# Altium PCB Hike_Buddy PCB Document.PcbDoc
Units mm, origin at the board's own origin, x right, y up, seen from the top; angles counter-clockwise.
Board outline 147 x 42.38 mm, 2 copper layers (Top Layer, Bottom Layer); 25 components, 18 nets, 121 pads, 10 vias.
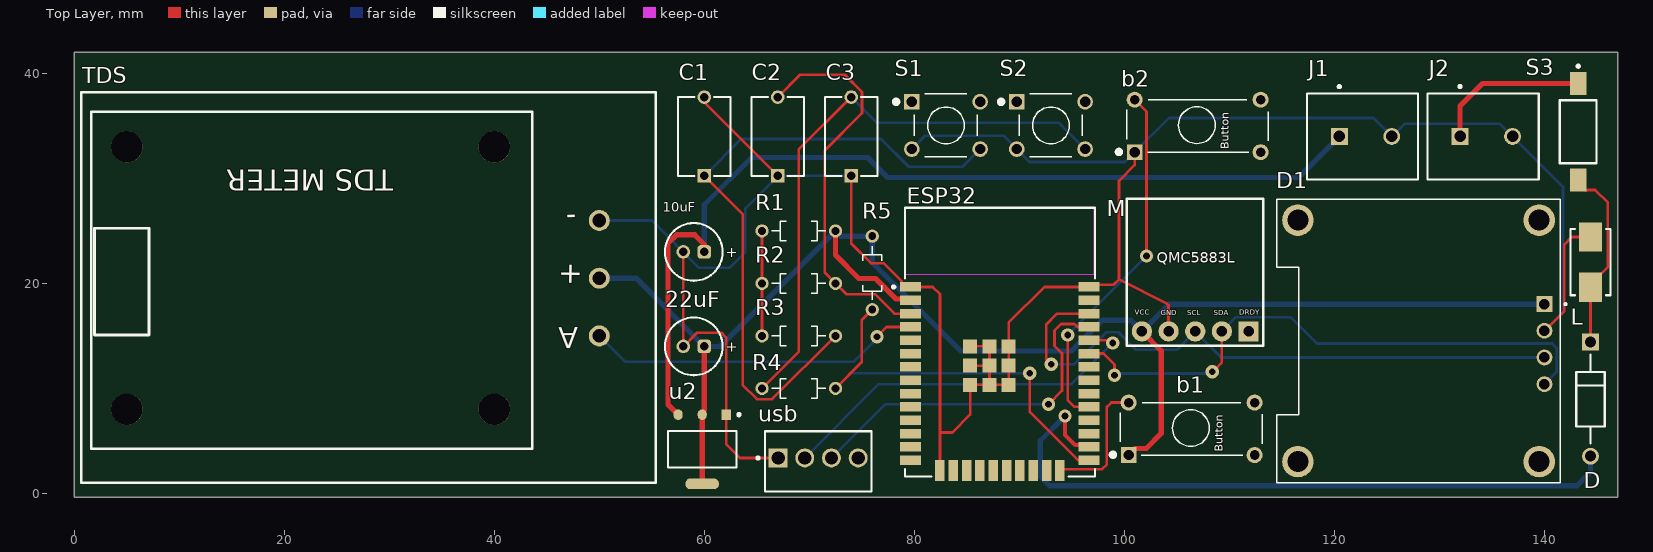
[diagram p0: Top Layer view]
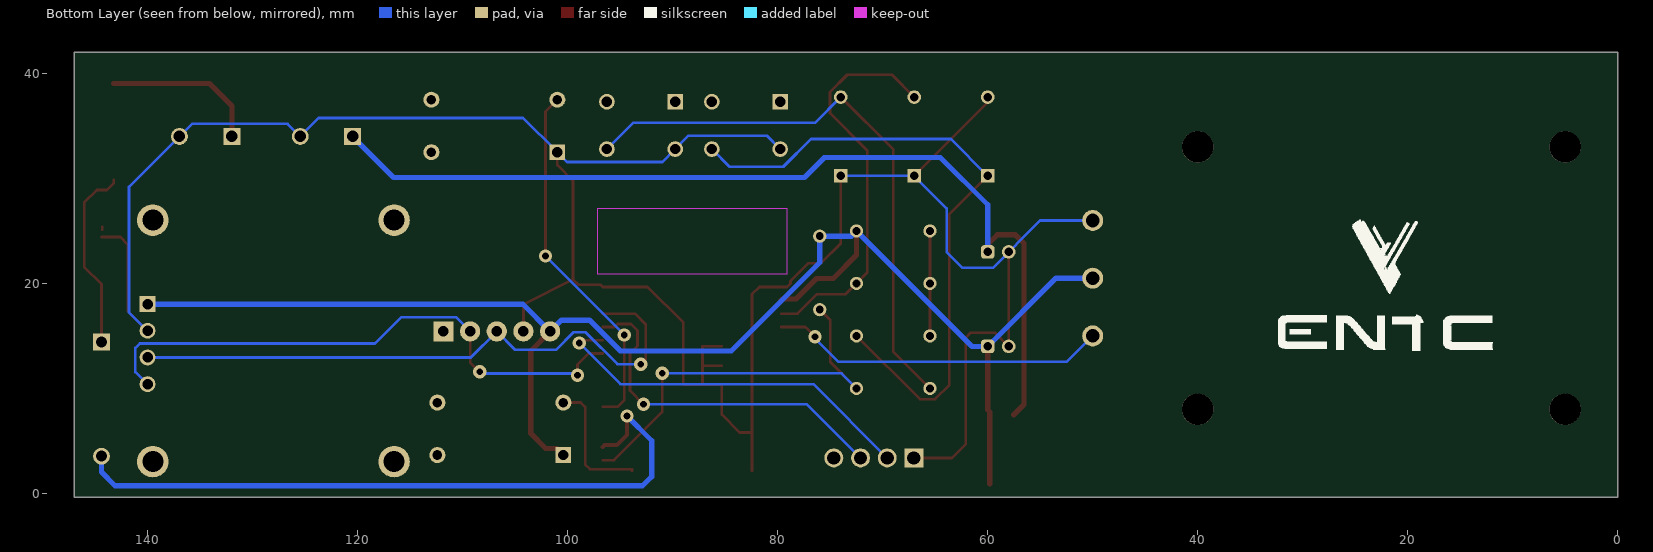
[diagram p1: Bottom Layer view, seen from below]
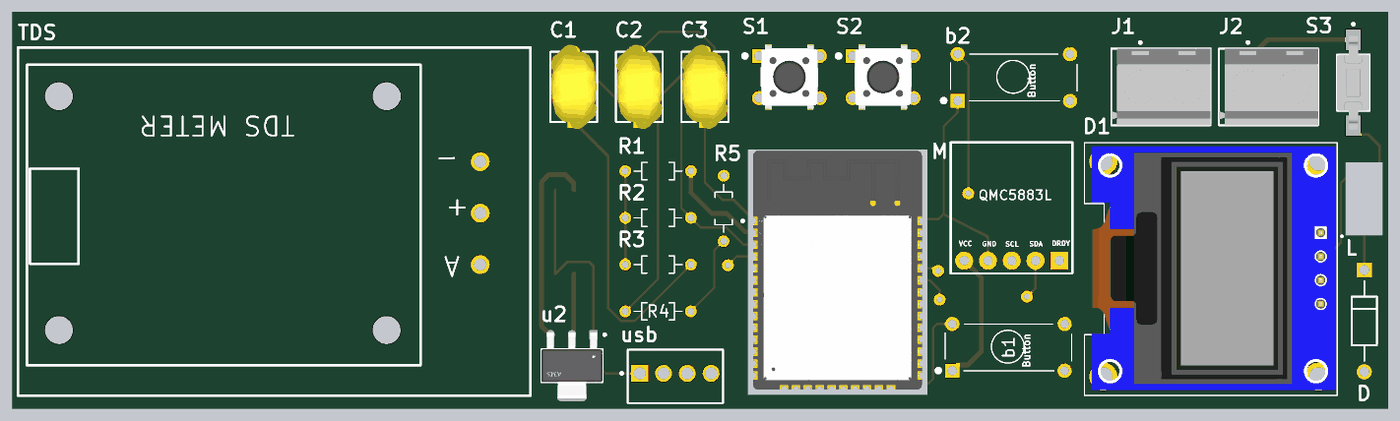
[diagram p2: 3D render of the assembled board from above, using the file's embedded part models]

## Layer stack, top to bottom
Top Solder: solder mask 0.0102, Solder Resist, Dk 3.5
Top Layer: signal copper 0.0356
Dielectric 1: dielectric 0.32, FR-4, Dk 4.8
Bottom Layer: signal copper 0.0356
Bottom Solder: solder mask 0.0102, Solder Resist, Dk 3.5

## Board outline
0,-0.381 147,-0.381 147,42 0,42

## Design rules (kind name [scope] priority, off if disabled: settings)
BoardOutlineClearance [All] p1: gap=0.2 ignorepadtopadclearanceinfootprint=FALSE
Clearance Clearance_1 [All] p1: gap=0.254 ignorepadtopadclearanceinfootprint=FALSE
Clearance [All] p2: gap=0.127 ignorepadtopadclearanceinfootprint=FALSE except(0.25: Arc-Hole Track-Hole SMDPad-Hole THPad-Hole Via-Hole Fill-Hole Poly-Hole Region-Hole Text-Hole)
ComponentClearance [All] p1: gap=0.127 collisioncheckmode=3 verticalgap=0.127 showdistances=TRUE
Height [All] p1: minheight=0 maxheight=1816.048 prefheight=12.7
HoleSize [All] p1: absolutevalues=TRUE maxlimit=6.3 minlimit=0.3 maxpercent=80.000 minpercent=20.000
HoleToHoleClearance [All] p1: gap=0.25 allowstackedmicrovias=FALSE
MinimumAnnularRing [All] p1: minimumring=0.076
MinimumSolderMaskSliver [All] p1: minsoldermaskwidth=0
PlaneClearance [All] p1: clearance=0.127
PlaneConnect PlaneConnectPowerPads [InPadClass('PowerPads')] p1: planeconnectstyle=Direct reliefexpansion=0.508 reliefentries=4 reliefconductorwidth=0.254 reliefairgap=0.254
PlaneConnect [All] p2: pad.planeconnectstyle=Relief pad.reliefexpansion=0.3 pad.reliefentries=4 pad.reliefconductorwidth=0.127 pad.reliefairgap=0.127 via.planeconnectstyle=Direct via.reliefexpansion=0.3 via.reliefentries=4 via.reliefconductorwidth=0.127 via.reliefairgap=0.127
PolygonConnect PolygonConnectPowerPads [All vs (InPadClass('PowerPads'))] p1: connectstyle=Direct reliefconductorwidth=0.254 reliefentries=4 polygonreliefangle="90 Angle" airgapwidth=0.254
PolygonConnect [All] p2: connectstyle=Relief reliefconductorwidth=0.254 reliefentries=4 polygonreliefangle="90 Angle" airgapwidth=0.254
RoutingVias [All] p1: holewidth=0.711 width=1.27 viastyle="Through Hole" minholewidth=0.711 minwidth=1.27 maxholewidth=0.711 maxwidth=1.27
SilkToSilkClearance [All] p1: silktosilkclearance=0
SilkToSolderMaskClearance [IsPad] p1: minsilkscreentomaskgap=0.127 clearancetoexposedcopper=TRUE
SolderMaskExpansion [All] p1: expansion=0.075 istentingtop=FALSE
Width Width_3 [(InNet('3V3') OR InNet('7.4V') OR InNet('7V4') OR InNet('IO4'))] p1: maxlimit=0.5 minlimit=0.254 preferedwidth=0.254 minimp=50.000000 maximp=50.000000 favimp=50.000000
Width Width_2 [(InNet('3V3') OR InNet('7V4') OR InNet('3V3') OR InNet('3V3'))] p2: maxlimit=0.5 minlimit=0.254 preferedwidth=0.254 minimp=50.000000 maximp=50.000000 favimp=50.000000
Width Width_1 [(InNet('3V3') OR InNet('7V4') OR InNet('3V3') OR InNet('3V3'))] p3: maxlimit=0.4 minlimit=0.254 preferedwidth=0.254 minimp=50.000000 maximp=50.000000 favimp=50.000000
Width [All] p4: maxlimit=0.254 minlimit=0.254 preferedwidth=0.254
21 further rules are at their usual default settings.

## Components (designator, comment, footprint, x,y, rotation, side; value= is the part's Value field where it differs from the comment)
10uF "860010372001" WCAP-ATG8_D5H11 1329,1293 r0 top
22uF "860020472004" WCAP-ATG5_D5H11 1329,1284 r0 top
b1 "Button" "Push Button" 106.425,6.15 r90 top
b2 "Button_1" "Push Button" 107,35 r90 top
C1 "1nF" FP-VY2102M29Y5US6TV7-MFG 60,34 r90 top
C2 "1nF" FP-VY2102M29Y5US6TV7-MFG 67,34 r90 top
C3 "1nF" FP-VY2102M29Y5US6TV7-MFG 74,34 r90 top
D "1N5817" FP-DO-41-MFG 144.425,8.975 r270 top
D1 "OLED Display" Display 128,16 r270 top
ESP32 "ESP32" ESP32 88.063,14.407 r0 top
J1 "282836-2" TECO-282836-2_V 123,34 r0 top
J2 "282836-2" TECO-282836-2_V 134.5,34 r0 top
L "LED" LED 144.425,22.025 r270 top
M "Compass(GY-271)" QMC 107,21 r0 top
R1 "10K" R1 69,25 r180 top
R2 "10K**" R1 69,20 r180 top
R3 "500" R1 69,15 r180 top
R4 "500" R1 69,10 r180 top
R5 "10K" R1 76,21 r270 top
S1 "Switch" Switch 83,35 r0 top
S2 "Switch2" Switch 93,35 r0 top
S3 "FSMSM" TECO-FSMSM-2_V 143.25,34.45 r270 top
TDS "" tds 27.427,19.386 r180 top
u2 "(Regulator)AMS1117-3.3" FP-AMS1117-IPC_C 59.8,4.2 r270 top
usb "640456-4" TECO-640456-4 70.845,3.375 r180 top

## Footprints (in the part's own frame and the unit in brackets; to place one, negate y for a bottom-side part, rotate by r counter-clockwise, add the part's x,y. Pads: shape width x height; smd on the part's side, far side on the other; paste and mask are expansions set on the pad)
Display [mm]
  rect 1.508x1.508 hole 1: 1(-2.025,12.039)
  round 1.508 hole 1: 2(0.515,12.039) 3(3.055,12.039) 4(5.595,12.039)
  round 3 hole 2: S1(-10.025,11.539) S2(12.975,11.539) S3(12.975,-11.45) S4(-10.025,-11.45)
  silkscreen extent -12.02,-13.46 14.98,14.14, body extent -11.6,-12.72 14.4,13.28, height 5.66
ESP32 [mm]
  rect 2x0.9 smd paste+0 mask+0: 1(-8.398,5.258) 2(-8.398,3.988) 3(-8.398,2.718) 4(-8.398,1.448) 5(-8.398,0.178) 6(-8.398,-1.092) 7(-8.398,-2.362) 8(-8.398,-3.632) 9(-8.398,-4.902) 10(-8.398,-6.172) 11(-8.398,-7.442) 12(-8.398,-8.712) 13(-8.398,-9.982) 14(-8.398,-11.252) 25(8.602,-11.252) 26(8.602,-9.982) 27(8.602,-8.712) 28(8.602,-7.442) 29(8.602,-6.172) 30(8.602,-4.902) 31(8.602,-3.632) 32(8.602,-2.362) 33(8.602,-1.092) 34(8.602,0.178) 35(8.602,1.448) 36(8.602,2.718) 37(8.602,3.988) 38(8.602,5.258)
  rect 0.9x2 smd paste+0 mask+0: 15(-5.613,-12.252) 16(-4.343,-12.252) 17(-3.073,-12.252) 18(-1.803,-12.252) 19(-0.533,-12.252) 20(0.737,-12.252) 21(2.007,-12.252) 22(3.277,-12.252) 23(4.547,-12.252) 24(5.817,-12.252)
  rect 1.33x1.33 smd paste+0 mask+0: 39(-2.733,-4.077) 39(-2.733,-2.242) 39(-2.733,-0.407) 39(-0.898,-4.077) 39(-0.898,-2.242) 39(-0.898,-0.407) 39(0.937,-4.077) 39(0.937,-2.242) 39(0.937,-0.407)
  Keep-Out Layer region: -8.898,6.448 9.102,6.448 9.102,12.748 -8.898,12.748
  Keep-Out Layer region: -8.898,6.448 9.102,6.448 9.102,12.748 -8.898,12.748
  silkscreen extent -10.15,-12.8 9.15,12.8, body extent -9.5,-13.35 9.7,12.9, height 0.25
FP-AMS1117-IPC_C [mm]
  rect 1.004x0.872 smd paste+0 mask+0: 1(-3.295,2.29)
  rrect100% 1.004x0.872 smd paste+0 mask+0: 2(-3.295,0) 3(-3.295,-2.29)
  rrect87% 1.004x3.182 smd paste+0 mask+0: 4(3.295,0)
  silkscreen extent -3.42,-3.25 1.75,3.63, body extent -3.9,-3.35 3.9,3.35, height 0.25
FP-DO-41-MFG [mm]
  rect 1.6x1.6 hole 1.05 paste-2539.97 mask+0: 1(-5.438,0)
  round 1.6 hole 1.05 paste-2539.97 mask+0: 2(5.438,0)
  silkscreen extent -4.24,-1.36 4.24,1.36
FP-VY2102M29Y5US6TV7-MFG [mm]
  rect 1.3x1.3 hole 0.8 paste-2539.97 mask+0: 1(-3.75,0)
  round 1.3 hole 0.8 paste-2539.97 mask+0: 2(3.75,0)
  silkscreen extent -3.75,-2.5 3.75,2.5, body extent -4.5,-2.6 4.5,2.6, height 0.25
LED [mm]
  rect 2.8x2.2 smd paste+0 mask+0: 1(-2.4,0) 2(2.4,0)
  silkscreen extent -3.15,-1.9 3.15,1.9
"Push Button" [mil]
  rect 58.98x58.98 / inner round 58.98 / far side rect 58.98x58.98 hole 38.98: 1(-98.42,236.22)
  round 60 hole 36 paste-99999 mask+1.97: 2(98.43,236.22) 3(-98.42,-236.22) 4(98.43,-236.22)
  silkscreen extent -105,-266 98,303
QMC [mm]
  rect 1.93x1.93 hole 1.001 paste-2539.97 mask+0.051: 1(4.85,-5.575)
  round 1.93 hole 1.001 paste-2539.97 mask+0.051: 2(2.31,-5.575) 3(-0.23,-5.575) 4(-2.77,-5.575) 5(-5.31,-5.575)
  silkscreen extent -6.75,-6.95 6.25,7.05
R1 [mm]
  round 1.258 hole 0.75: 1(-3.5,0) 2(3.5,0)
  silkscreen extent -2.55,-0.93 2.55,0.93
Switch [mm]
  rect 1.498x1.498 / inner round 1.498 / far side rect 1.498x1.498 hole 0.99: 1(-3.225,2.3)
  round 1.498 hole 0.99: 2(-3.225,-2.2) 3(3.275,2.3) 4(3.275,-2.2)
  silkscreen extent -4.92,-2.95 3.03,3.05, body extent -2.97,-3.9 3.02,4, height 9.5
tds [mm]
  round 2 hole 1.3 paste-2539.97 mask+0.051: 1(-22.573,-6.614) 2(-22.573,-1.114) 3(-22.573,4.386)
  round 3 hole 3 unplated paste-2539.97: ""(-12.573,11.386) ""(-12.573,-13.614) ""(22.427,11.386) ""(22.427,-13.614)
  silkscreen extent -27.94,-18.82 26.8,18.39
TECO-282836-2_V [mm] "Female Header, Pitch 5mm, 1 x 2 Position, Height 10mm"
  rect 1.6x1.6 hole 1.1: 1(-2.5,0)
  round 1.6 hole 1.1: 2(2.5,0)
  silkscreen extent -5.6,-4.1 5,4.87, body extent -5.6,-4.1 5,4.1, height 10
TECO-640456-4 [mm] "Through Hole, 4-Leads, Body 10.16x5.72mm, Pitch 2.54mm"
  rect 1.8x1.8 hole 1.27 paste-2539.97: 1(3.81,0)
  round 1.8 hole 1.27 paste-2539.97: 2(1.27,0) 3(-1.27,0) 4(-3.81,0)
  silkscreen extent -5.08,-2.54 5.86,3.18, body extent -5.08,-2.54 5.08,3.18, height 10.03
TECO-FSMSM-2_V [mm] "SMD, 2-Leads, Body 6x3.5mm, Pitch 9.19mm"
  rect 2.2x1.6 smd: 1(-4.595,0)
  rect 2.18x1.6 smd: 2(4.595,0)
  silkscreen extent -6.37,-1.75 3,1.75, body extent -4.98,-1.75 4.98,1.75, height 4.4
WCAP-ATG5_D5H11 [mm] "Aluminum Electrolytic Capacitors, 5x11mm"
  rrect50% 1.3x1.3 hole 0.8: 1(-1269,-1270)
  round 1.3 hole 0.8: 2(-1271,-1270)
  silkscreen extent -1272.75,-1272.75 -1267.25,-1267.25, body extent -1272.49,-1272.5 -1267.5,-1267.5, height 11.31
WCAP-ATG8_D5H11 [mm] "Aluminum Electrolytic Capacitors, 5x11mm"
  rrect50% 1.3x1.3 hole 0.8: 1(-1269,-1270)
  round 1.3 hole 0.8: 2(-1271,-1270)
  silkscreen extent -1272.75,-1272.75 -1267.25,-1267.25, body extent -1272.49,-1272.5 -1267.5,-1267.5, height 11.31

## Part data
10uF: library part CMP-03913-54007181-1, "860010372001 Cap Aluminum Lytic 10uF 16V 20% (5 X 11mm) Radial 2mm 44mA 2000h 85C", Capacitance=10µF, Case/Package=Radial, Leakage Current=3µA, Max Operating Temperature=85°C, Min Operating Temperature=-40°C, Ripple Current=44mA, Tolerance=20%, Voltage Rating=16V, Diameter=5mm, Height=11mm, Height - Seated (Max)=12.4968mm, Lead Pitch=2.0066mm, Length=11mm, Life (Hours)=2000hours, Material=Aluminium, Mount="Through Hole", NexarPartId=54007181, Packaging="Tape & Box (TB)", Pitch=2mm, Polarity=Polar, REACH SVHC=Unknown, RoHS=Compliant, Voltage Rating (DC)=16V
22uF: library part CMP-03913-53914186-1, "860020472004 WCAP-ATG5 Aluminum Electrolytic Capacitors", Capacitance=22µF, Case/Package=Radial, Leakage Current=5.5µA, Max Operating Temperature=105°C, Min Operating Temperature=-40°C, Ripple Current=58mA, Tolerance=20%, Voltage Rating=25V, Diameter=5mm, Height - Seated (Max)=12.4968mm, Lead Pitch=2.0066mm, Length=11mm, Life (Hours)=2000hours, Mount="Through Hole", NexarPartId=53914186, Packaging="Tape & Box (TB)", Pitch=2mm, Polarity=Polar, RoHS=Compliant
C1 C2 C3: library part CMP-00030-42817980-1, "VY2102M29Y5US6TV7 Cap Ceramic Suppression X1/Y2 0.001uF 440VAC/300VAC Y5U 20% (7.5 X 5mm) Radial 7.5mm 125C T/R", Case/Package=Radial, Dielectric=Y5U, Max Operating Temperature=125°C, Min Operating Temperature=-40°C, Tolerance=20%, Voltage=300V, Voltage Rating=1kV, Capacitance=1nF, Composition=Ceramic, Depth=5mm, Diameter=7.5mm, Height=10.5mm, Height - Seated (Max)=11.5062mm, Lead Diameter=600µm, Lead Free="Lead Free", Lead Pitch=7.5mm, Lead/Base Style=Kinked, Material=Ceramic, Mount="Through Hole", NexarPartId=42817980, Packaging="Tape & Reel (TR)", Radiation Hardening=No, REACH SVHC=Unknown, RoHS=Compliant, Schedule B="8532230060, 8532230060", Termination=Radial, Voltage Rating (AC)=300V
D: library part CMP-12187-000037-1, "DIODE SCHOTTKY 20V 1A DO41", Average Rectified Current=1A, Capacitance=110pF, Case/Package=DO-41, Forward Voltage=450mV, Max Forward Surge Current (Ifsm)=25A, Max Operating Temperature=150°C, Max Repetitive Reverse Voltage (Vrrm)=20V, Max Reverse Current=500uA, Min Operating Temperature=-65°C, Package Quantity=2000, Current Rating=1A, Element Configuration=Single, Forward Current=1A, Height=2.7mm, Lead Free="Lead Free", Length=5.2mm, Max Reverse Leakage Current=500uA, Max Reverse Voltage (DC)=20V, Max Surge Current=25A, Mount="Through Hole", Number of Pins=2, Output Current=1A, Packaging="Cut Tape", Peak Non-Repetitive Surge Current=25A, Polarity=Standard, Radiation Hardening=No, REACH SVHC="No SVHC", RoHS Compliant=Yes, Series=-, Voltage Rating (DC)=20V, Weight=0.01lb, Width=2.7mm
D1: library part Display, "0.96 inch 128X64 OLED Display Module Blue I2C IIC"
ESP32: library part ESP32W, "ESP-WROOM-32"
J1 J2: library part CMP-1684-00017-1, "Female Header, Pitch 5 mm, 1 x 2 Position, Height 10 mm, Tail Length 3.5 mm, Rohs, Bulk", Color=Green, Current=13.5A, Manufacturer="TE Connectivity", Package Description="Female Header, Pitch 5 mm, 1 x 2 Position, Height 10 mm, Tail Length 3.5 mm", Package Reference=THD, Standard Package=300, Voltage=300V, 3D Model=282836-2.pdf, Category=Connectors,Interconnects, Clamp Material - Plating=Brass-NickelPlated, Contact Material - Plating=Brass-TinPlated, Datasheet URL=http://www.te.com.cn/commerce/DocumentDelivery/DDEController?Action=showdoc&DocId=Catalog+Section%7F1308389_EUROSTYLE_TERMINAL_BLOCKS%7F0607%7Fpdf%7FEnglish%7FENG_CS_1308389_EUROSTYLE_TERMINAL_BLOCKS_0607.pdf%7F282836-2, Dynamic Catalog=BuchananSeries, Family=TerminalBlocks-WiretoBoard, Featured Product=EurostyleTerminalBlockConnectors, Features=Interlocking(Side), Housing Material=Polyamide(PA66),Nylon6/6, Manufacturer URL=http://www.te.com, Mating Orientation=HorizontalwithBoard, Mounting Type=ThroughHole, Number of Levels=1, Other Names="5ULV-02B / A98076", Packaging=Bulk, Pitch="0.197\"(5.00mm)", Positions Per Level=2, Product Training Modules=Wire-to-BoardEurostyleTerminalBlocks, RoHS Information=282836-2StatementofCompliance, Screw Material - Plating=Brass-NickelPlated, Screw Thread=M3, Series=Buchanan, Torque - Screw=0.68Nm(6Lb-In), Wire Gauge=16-30AWG, Wire Termination=Screw-RisingCageClamp
M: library part Magnetometer, "GY-271 HMC5883L 3-Axis Compass Magnetometer Module"
R1: library part R1
R2: library part R2
R3: library part R3
R4: library part R4
R5: library part R5
S3: library part CMP-2000-07511-1, "FSMSM Push Button Switch, 50 mA, -35 to 85 degC, 2-Pin SMD, RoHS, Bulk", Case\/Package=SMD/SMT, Contact Current Rating=50mA, Contact Resistance=100mOhm, Manufacturer="TE Connectivity", Max Operating Temperature=85degC, Max Voltage Rating (DC)=12V, Min Operating Temperature=-35degC, Operating Force=180gf, Package Description="2-Pin Surface Mount Device, Body 6 x 3.5 mm, Pitch 9.19 mm", Package Quantity=1000, Voltage Rating (DC)=24V, Actuator Length=1.07mm, Actuator Material=Polyamide, Contact Material=Brass, Contact Plating=Silver, Current Rating=50mA, Datasheet URL=http://www.te.com/commerce/DocumentDelivery/DDEController?Action=showdoc&DocId=Customer+Drawing%7F1437566-3%7FC2%7Fpdf%7FEnglish%7FENG_CD_1437566-3_C2_1437566_3_1_c.dwg.pdf%7F1437566-3, Datasheet Version="Rev. C2, 08/2014", Electrical Life=20000Cycles, ELV=Compliant, Illumination Type=Illuminated, Lead Free=LeadFree, Manufacturer URL=http://www.te.com/, Mechanical Life=20000Cycles, Mount=SurfaceMount, Mounting Technology=SurfaceMount, Orientation=Straight, Package Reference=FSMSM, Packaging=LoosePiece, REACH SVHC=Unknown, RoHSCompliant=true, Switch Travel=0.25mm, Termination=GullWing, Throw Configuration=SPST
TDS: library part tds
u2: library part CMP-209535-000001-1, "LDO Voltage Regulators 1A, 3.3V", Dropout Voltage=1.1V, Manufacturer="Advanced Monolithic Systems", Manufacturer Part Number=AMS1117-3.3, Max Junction Temp=+125°C, Max Power Dissipation=1.2W, Max Supply Voltage=15V, Nominal Supply Current=5mA, Output Current=1A, Output Voltage=3.3V, Package=AMS1117, Temperature="-40°C to +125°C", Temperature Range Low=-40°C, Automotive=No, Category=IC, ComponentLink2Description=Datasheet, ComponentLink2URL=http://www.advanced-monolithic.com/pdf/ds1117.pdf, Device Class L1="Integrated Circuits (ICs)", Device Class L2="Power Management ICs", Device Class L3="Voltage Regulators - Linear", Height=1.8mm, Ipc Land Pattern Name=SOT229P700X180-4, Lead Free=Yes, Number Of Outputs=1, Octopart=https://octopart.com/ams1117-3.3-advanced+monolithic+systems-25899300, Output Type=Fixed, RoHS=TRUE, Standoff Height=0.64mm, Temperature Range High=+125°C
usb: library part CMP-2000-05419-1, "Male Header, Pitch 2.54 mm, 1 x 4 Position, Height 10.03 mm, Tail Length 3.56 mm, RoHS, Bulk", Color=White, Current, Rating="5 /  / A", Flammability Rating=UL94V-0, Manufacturer="TE Connectivity", Temperature, Operating="-55to+105 /  / degC", Voltage, Rating="250 /  / V", Agency Approvals=CSA,UL, Angle=Straight, Brand/Series=MTA-100Series, Color, Housing=White, Connector Type=MTA-100, Contact Centerline Spacing="0.100 /  / in.", Contact Mating Area Plating=Tin, Contact Plating=Tin, Contact Shape=Square, Contact Termination Area Plating=Tin, Datasheet URL=https://datasheet.ciiva.com/16286/eng-ds-82056-mta-0608-16286228.pdf, Datasheet Version=Dec-14, Length, Overall="0.4 /  / \"", Length, Pin="0.14 /  / \"", Length, Terminal Post="0.14 /  / in.", Manufacturer URL=http://www.te.com/, Material, Contact=CopperAlloy, Material, Housing=Polyester, Mount Angle=Vertical, Mounting Hole Size="0.04 /  / \"", Mounting Type=PCMount, Number of Contacts=4, Number of Positions=4, Number of Rows=1, Pin Spacing="0.1 /  / \"", Primary Type=InterconnectSystem, Size, Post="0.025 /  / in.", Special Features=Pinstrip, Standards=RoHSCompliant,ELVCompliant,UL94V-0, Termination=Solder, Type=PCBPlug

## Via types
v1: diameter 1.27, hole 0.635, Top Layer to Bottom Layer, 10 vias

## Nets (pads, with @x,y where several pads share a name; then routed paths per layer and width w, separated by ;. In a path a pad name is that pad's centre, name@x,y a point inside that pad or via, vN(x,y) a via of type N, cw(c..) or ccw(c..) an arc to the next point about the centre after c; other vN are vias at no path point)
3V3: 22uF.1 b1.1 D1.1 ESP32.2 M.5 R1.1 R5.1 TDS.2 u2.2 u2.4 | length 145.1
  Top Layer w0.5: u2.4 u2.2 59.8,7.728 60,7.928 22uF.1 ; R1.1 72.5,22.696 74.721,20.475 76.3,20.475 78.267,18.508 79.552,18.508 ESP32.2 ; b1.1 101.047,4.272 102.097,4.272 103.525,5.7 103.525,13.59 M.5
  Bottom Layer w0.5: TDS.2 53.5,20.5 22uF.1 61.5,14 R1.1 73,24.5 R5.1 76,21.993 84.43,13.564 94.996,13.564 97.932,16.5 100.615,16.5 M.5 104.29,18.025 D1.1
7.4V: J2.1 S3.1 | length 15
  Top Layer w0.5: J2.1 132,36.9 134.145,39.045 S3.1
7V4: 10uF.1 J1.1 u2.3 | length 90.9
  Top Layer w0.5: u2.3 56.55,8.455 56.55,23.825 57.35,24.625 59.093,24.625 60,23.718 10uF.1
  Bottom Layer w0.5: 10uF.1 60,27.488 64.516,32.004 75.565,32.004 77.469,30.1 116.6,30.1 J1.1
EN: C2.2 ESP32.3 R2.1 | length 38.1
  Top Layer w0.254: C2.2 69.128,39.878 73.381,39.878 75.032,38.227 75.032,36.22 71.476,32.664 71.476,21.024 R2.1 73.525,18.975 76.275,18.975 78.125,17.125 ESP32.3
GND: 10uF.2 22uF.2 b2.1 C1.2 C2.1 C3.1 D1.2 ESP32.1 ESP32.15 ESP32.38 ESP32.39 J1.2 J2.2 L.1 M.4 S1.2 S2.2 TDS.1 u2.1 usb.1 | length 257.4
  Top Layer w0.254: 10uF.2 22uF.2 59.3,15.3 61.625,15.3 62.09,14.835 u2.1 62.09,4.699 63.414,3.375 usb.1 ; C1.2 60,37.25 C2.1 ; C3.1 74,23.8 75.875,21.925 77.075,21.925 78.792,20.208 78.792,19.988 79.115,19.665 ESP32.1 81.763,19.665 82.45,18.978 82.45,5.8 ; ESP32.15 82.45,5.8 ; ESP32.39@85.33,12.165 ESP32.39@87.165,12.165 ; ESP32.39@85.33,14 87.165,14 ESP32.39@87.165,12.165 ; b2.1 101,31.275 99.5,29.775 99.5,20.388 ; M.4 104.23,17.909 104.091,18.048 99.5,20.388 ; D1.2 141.928,17.374 141.928,23.728 142.625,24.425 L.1 ; L.1@144.35,25.1 L.1@144.35,25.4 ; 82.45,5.8 83.625,5.8 85.33,7.505 85.33,10.33 ESP32.39@87.165,10.33 ; ESP32.39@87.165,10.33 89,10.33 89,12.165 89,14 89,16.254 92.411,19.665 ESP32.38 96.872,19.872 98.985,19.872 99.5,20.388 ; ESP32.39@87.165,10.33 ESP32.39@87.165,12.165
  Bottom Layer w0.254: TDS.1 55,26 59.512,21.488 62.408,21.488 63.906,22.987 63.906,27.156 C2.1 C3.1 ; S1.2 81.05,34.075 88.5,34.075 S2.2 91.003,31.572 100.072,31.572 b2.1 104.263,35.763 123.737,35.763 J1.2 126.704,35.204 135.796,35.204 J2.2 141.8,29.2 141.8,17.246 D1.2
IO0: ESP32.25 R4.1 R5.2 | length 39.3
  Top Layer w0.254: R4.1 75,12.5 75,16.5 R5.2 ; v1(91.008,11.43) 91.008,7.742 95.595,3.155 ESP32.25
  Bottom Layer w0.254: R4.1 73.93,11.43 v1(91.008,11.43)
IO2: b1.2 ESP32.24 | length 12.5
  Top Layer w0.254: ESP32.24 93.88,2.311 97.892,2.311 98.35,2.77 98.35,8.225 98.775,8.65 b1.2
IO4: D.2 ESP32.26 | length 66.2
  Top Layer w0.4: v1(94.361,7.366) 94.361,5.564 95.333,4.592 96.498,4.592 ESP32.26
  Bottom Layer w0.5: v1(94.361,7.366) 92.009,5.014 92.009,1.591 92.875,0.725 143.125,0.725 144.425,2.025 D.2
IO5: b2.2 ESP32.29 | length 34.5
  Top Layer w0.254: v1(94.615,15.088) 94.615,8.895 95.275,8.235 ESP32.29 ; b2.2 102.133,36.367 v1(102.133,22.606)
  Bottom Layer w0.254: v1(94.615,15.088) v1(102.133,22.606)
IO21: D1.4 ESP32.33 M.2 | length 55.1
  Top Layer w0.254: ESP32.33 98.035,13.315 99.075,12.275 v1(99.075,11.25) ; v1(108.4,11.575) 109.31,12.485 M.2
  Bottom Layer w0.254: v1(99.075,11.25) 99.238,11.413 108.238,11.413 v1(108.4,11.575) ; M.2 110.674,16.789 115.849,16.789 118.364,14.275 140.767,14.275 141.199,13.843 141.199,11.565 D1.4
IO22: D1.3 ESP32.36 M.3 | length 59.2
  Top Layer w0.254: v1(93.066,12.311) 92.583,12.794 92.583,16.108 93.6,17.125 ESP32.36
  Bottom Layer w0.254: v1(93.066,12.311) 95.262,12.311 98.298,15.347 99.439,15.347 101.121,13.665 105.01,13.665 M.3 109.25,12.945 D1.3
NetC1_1: C1.1 R3.1 S1.4 | length 62.9
  Top Layer w0.254: C1.1 63.652,26.598 63.652,10.338 65.024,8.966 66.466,8.966 R3.1
  Bottom Layer w0.254: C1.1 63.507,33.757 76.835,33.757 79.477,31.115 84.59,31.115 S1.4
NetC3_2: C3.2 R4.2 S2.4 | length 55.6
  Top Layer w0.254: R4.2 68.986,13.486 68.986,32.736 C3.2
  Bottom Layer w0.254: C3.2 76.45,35.3 93.775,35.3 S2.4
NetD_1: D.1 L.2 S3.2 | length 17.9
  Top Layer w0.254: S3.2 143.25,29.565 143.923,28.892 144.873,28.892 146.075,27.69 146.075,21.575 144.425,19.925 L.2 D.1
NetR1_2: R1.2 R2.2 R3.2 | length 10
  Top Layer w0.254: R3.2 R2.2 R1.2
RXD0: ESP32.34 usb.2 | length 36.2
  Top Layer w0.254: ESP32.34 98.648,14.585 v1(98.908,14.326)
  Bottom Layer w0.254: usb.2 76.603,10.403 94.985,10.403 v1(98.908,14.326)
"SENSOR VP": ESP32.4 TDS.3 | length 32.2
  Top Layer w0.254: v1(76.45,14.925) 77.38,15.855 ESP32.4
  Bottom Layer w0.254: TDS.3 52.478,12.522 74.213,12.522 76.45,14.759 v1(76.45,14.925)
TXD0: ESP32.35 usb.3 | length 34.3
  Top Layer w0.254: v1(92.786,8.484) 94.082,9.779 94.082,13.335 93.37,14.046 93.37,15.519 93.98,16.129 95.275,16.129 95.549,15.855 ESP32.35
  Bottom Layer w0.254: usb.3 77.224,8.484 v1(92.786,8.484)
pads on no net: b1.3 b1.4 b2.3 b2.4 D1.S1 D1.S2 D1.S3 D1.S4 ESP32.5 ESP32.6 ESP32.7 ESP32.8 ESP32.9 ESP32.10 ESP32.11 ESP32.12 ESP32.13 ESP32.14 ESP32.16 ESP32.17 ESP32.18 ESP32.19 ESP32.20 ESP32.21 ESP32.22 ESP32.23 ESP32.27 ESP32.28 ESP32.30 ESP32.31 ESP32.32 ESP32.37 M.1 S1.1 S1.3 S2.1 S2.3 TDS. usb.4

## Silkscreen, mask and mechanical layers (free items; w line width, h text height)
Bottom Overlay:
  drawing of 8 lines, arcs and shapes, not listed

## Text inside footprints (layer, text, board x,y; h text height)
10uF: Top Overlay "+" at 62.05,22.5 h1
22uF: Top Overlay "+" at 62.05,13.5 h1
b2: Top Overlay "Button" at 109.95,32.8 h0.75 r90
M: Top Overlay "QMC5883L" at 103.102,21.952 h1; Top Overlay "SCL" at 106.002,16.952 h0.5; Top Overlay "SDA" at 108.552,16.977 h0.5; Top Overlay "DRDY" at 110.952,17.027 h0.5; Top Overlay "GND" at 103.502,16.977 h0.5; Top Overlay "VCC" at 101.027,17.002 h0.5
TDS: Top Overlay "+" at 48.152,19.711 h2.03 r89.27; Top Overlay "A" at 47.976,15.831 h2.03 r180.53; Top Overlay "-" at 47.799,27.192 h2.03 r181.77; Top Overlay "TDS METER" at 30.348,30.841 h2.03 r180